# Altium PCB Pikachu_Charger.PcbDoc
Units mm, origin at the board's own origin, x right, y up, seen from the top; angles counter-clockwise.
Board outline 32.49 x 25.05 mm, 2 copper layers (Top Layer, Bottom Layer); 9 components, 7 nets, 32 pads, 2 vias.
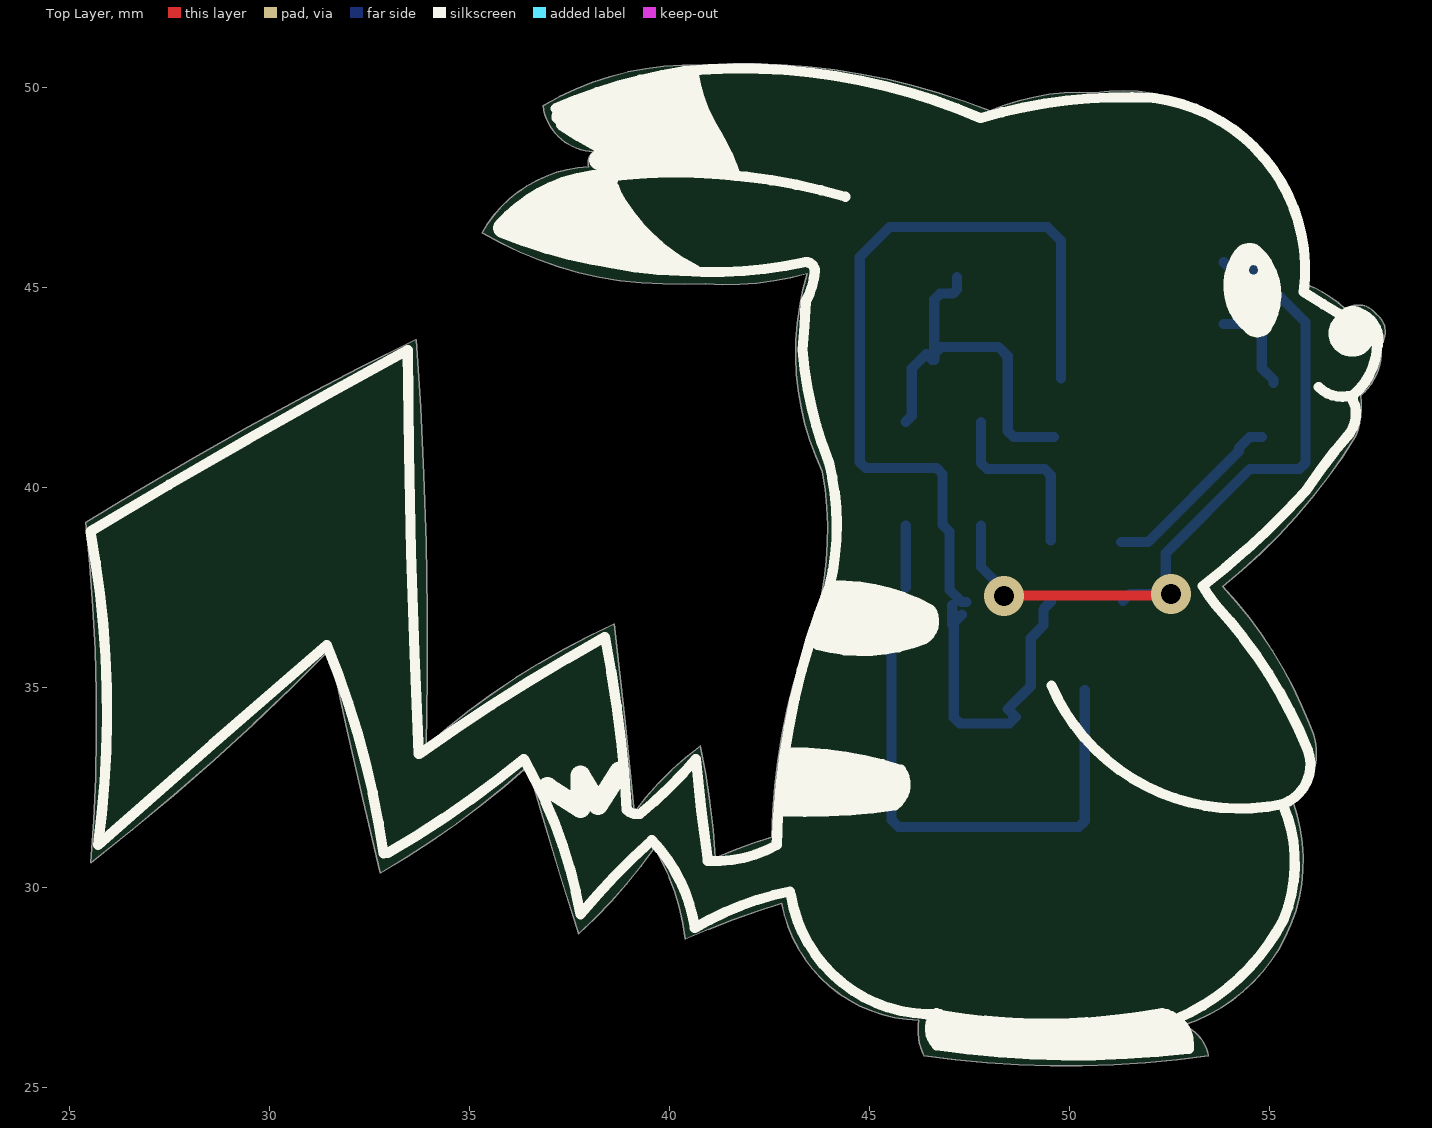
[diagram p0: Top Layer view]
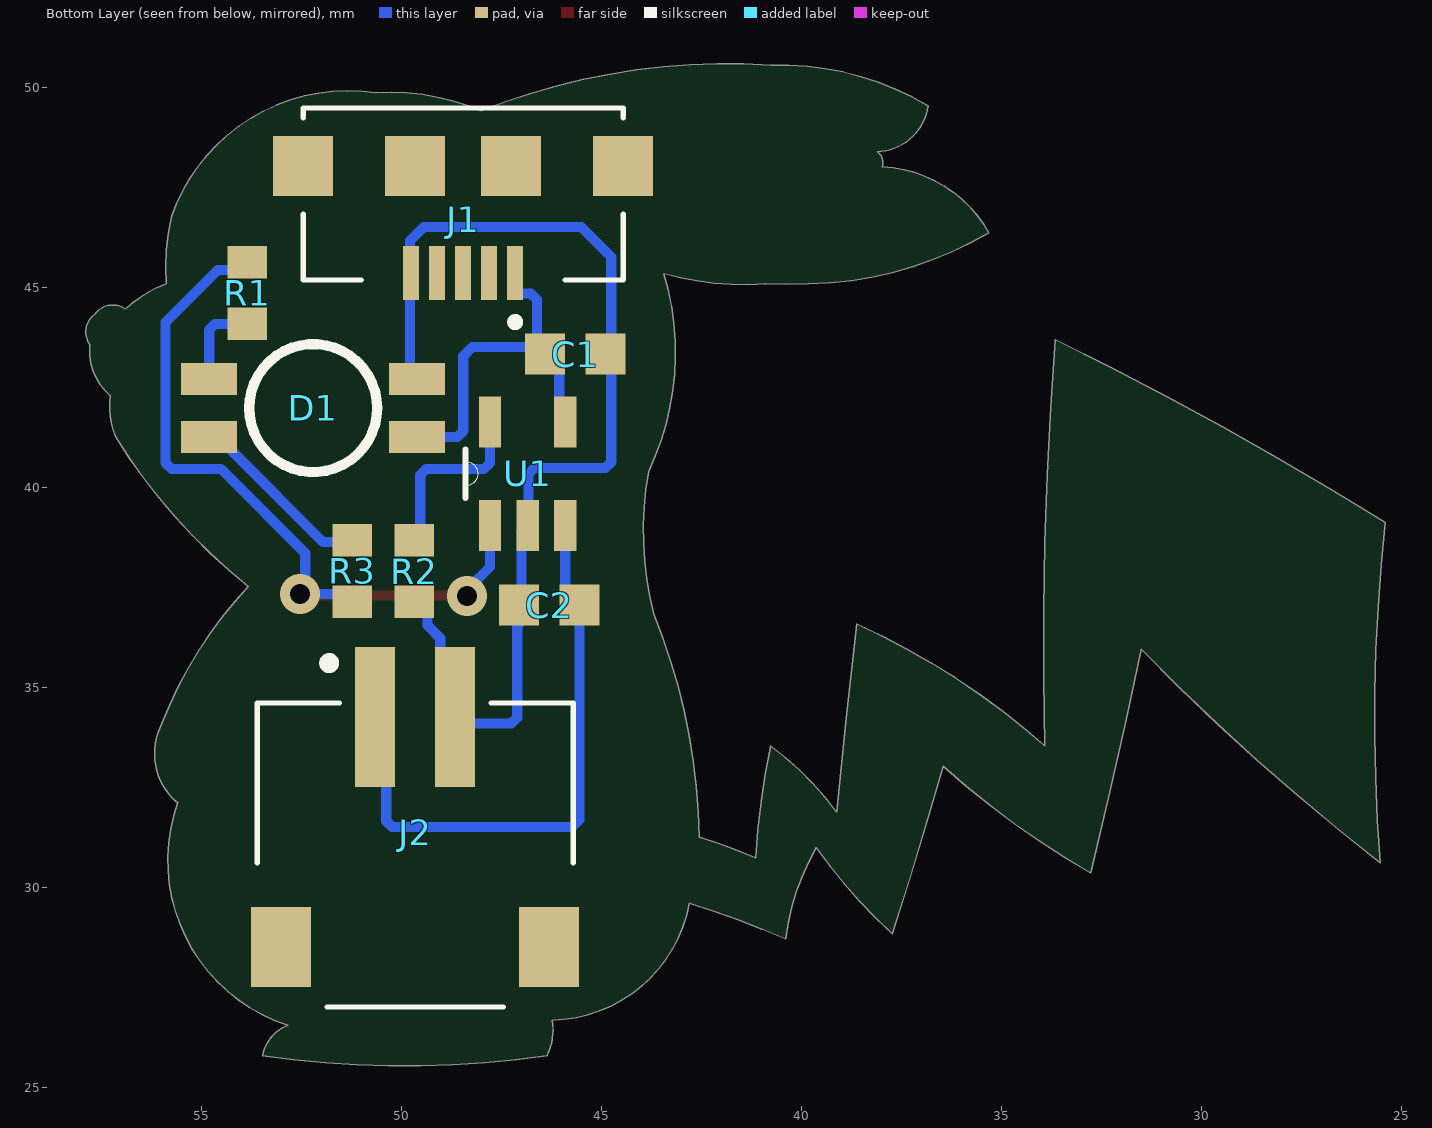
[diagram p1: Bottom Layer view, seen from below]
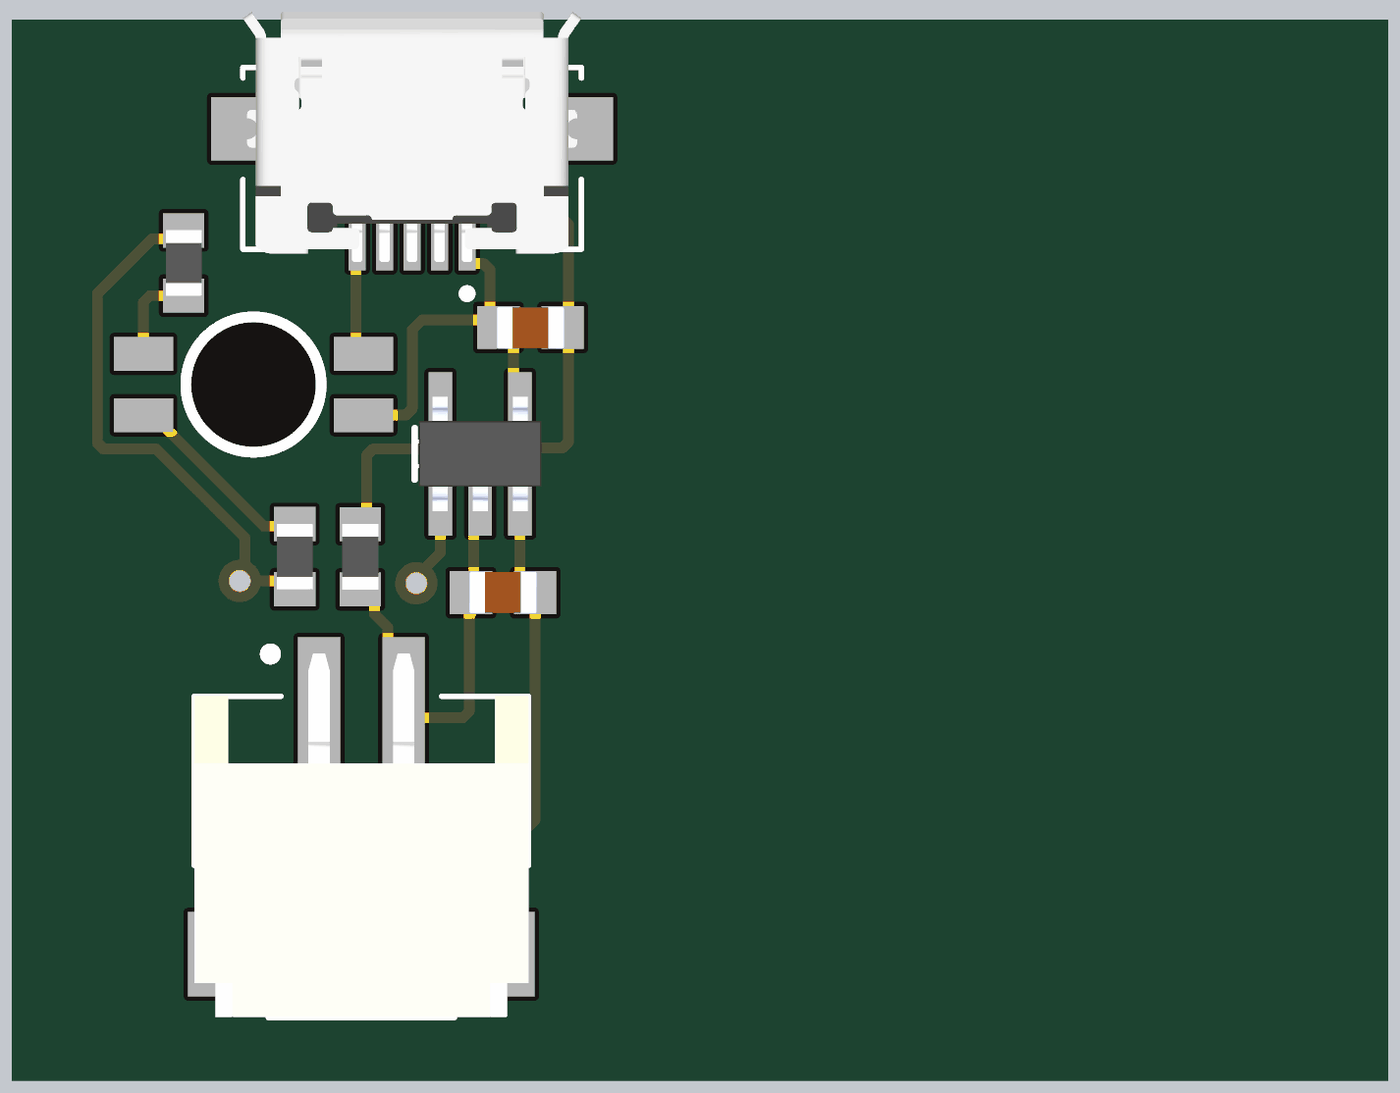
[diagram p2: 3D render of the assembled board from below, using the file's embedded part models]

## Layer stack, top to bottom
Top Solder: solder mask 0.0102, Solder Resist, Dk 3.5
Top Layer: signal copper 0.0356
Dielectric 1: dielectric 0.32, FR-4, Dk 4.8
Bottom Layer: signal copper 0.0356
Bottom Solder: solder mask 0.0102, Solder Resist, Dk 3.5

## Board outline
32.766,30.353 ccw(c21.757,49.432) 36.449,33.02 ccw(c161.566,68.646) 37.719,28.829 ccw(c28.956,38.481) 39.624,30.988 cw(c34.354,27.961) 40.386,28.702 cw(c49.149,8.635) 42.799,29.591 ccw(c46.311,30.241) 46.228,26.67 ccw(c47.625,26.416) 46.355,25.781 ccw(c49.911,50.514) 53.467,25.781 ccw(c52.483,25.606) 52.832,26.543 ccw(c51.498,30.67) 55.588,32.117 55.626,32.131 ccw(c54.547,33.337) 55.983,34.084 ccw(c46.086,30.247) 53.824,37.513 ccw(c44.647,48.979) 57.15,41.275 ccw(c55.181,42.037) 57.277,42.291 ccw(c56.306,43.416) 57.785,43.561 ccw(c57.34,43.878) 57.658,44.323 ccw(c57.213,44.006) 56.896,44.45 ccw(c54.642,41.973) 55.88,45.085 ccw(c50.038,45.466) 55.753,46.736 ccw(c51.308,45.212) 50.624,49.861 ccw(c50.274,44.15) 48.006,49.403 ccw(c41.873,34.056) 40.767,50.546 ccw(c40.515,43.388) 36.83,49.53 ccw(c38.14,49.709) 38.1,48.387 ccw(c38.291,48.112) 37.973,48.006 ccw(c38.119,44.79) 35.306,46.355 ccw(c40.087,54.543) 38.752,45.156 ccw(c40.259,58.27) 40.894,45.085 ccw(c41.465,52.197) 43.434,45.339 ccw(c50.088,43.36) 43.815,40.386 cw(c35.539,38.901) 43.688,36.83 ccw(c58.052,30.987) 42.547,31.242 42.545,31.242 ccw(c46.164,19.115) 41.148,30.734 41.136,30.733 ccw(c22.416,29.686) 40.767,33.528 ccw(c45.276,27.368) 39.116,31.877 ccw(c-367.635,-9.719) 38.608,36.576 ccw(c46.342,19.507) 33.909,33.528 ccw(c-67.818,36.068) 33.655,43.688 ccw(c74.777,-40.299) 25.4,39.116 cw(c-20.551,34.175) 25.527,30.607 ccw(c-10.395,76.813) 31.496,35.941 ccw(c174.068,65.405)

## Design rules (kind name [scope] priority, off if disabled: settings)
Clearance [All] p1: gap=0.254 ignorepadtopadclearanceinfootprint=FALSE except(0: Arc-Hole Track-Hole SMDPad-Hole THPad-Hole Via-Hole Fill-Hole Poly-Hole Region-Hole Text-Hole)
PolygonConnect [All] p1: connectstyle=Relief reliefconductorwidth=0.254 reliefentries=4 polygonreliefangle="90 Angle" airgapwidth=0.254
RoutingVias [All] p1: holewidth=0.711 width=1.27 viastyle="Through Hole" minholewidth=0.711 minwidth=1.27 maxholewidth=0.711 maxwidth=1.27
SolderMaskExpansion [All] p1: expansion=0.102 istentingtop=FALSE
Width [All] p1: maxlimit=0.254 minlimit=0.254 preferedwidth=0.254
30 further rules are at their usual default settings.

## Components (designator, comment, footprint, x,y, rotation, side; value= is the part's Value field where it differs from the comment)
C1 "GRM188R61E106KA73J" CAPC1608X100N 45.65,43.325 r0 bottom
C2 "GRM188R61E106KA73J" CAPC1608X100N 46.3,37.05 r180 bottom
D1 "XZMDKVG45WT-9" XZMDKVG45WT-9 52.2,41.975 r0 bottom
J1 "629105136821" WE_629105136821 48.45,48.025 r0 bottom
J2 "S2B-PH-SM4-TB(LF)(SN)" JST_S2B-PH-SM4-TB(LF)(SN) 49.65,34.25 r180 bottom
R1 "MCT0603HC1001FP100" RESC1508X55N 53.85,44.85 r90 bottom
R2 "MCT0603HC1001FP100" RESC1508X55N 49.675,37.9 r270 bottom
R3 "MCT0603HC1001FP100" RESC1508X55N 51.225,37.904 r270 bottom
U1 "MCP73831T-2ACI/OT" SOT95P280X145-5N 46.84,40.334 r90 bottom

## Footprints (in the part's own frame and the unit in brackets; to place one, negate y for a bottom-side part, rotate by r counter-clockwise, add the part's x,y. Pads: shape width x height; smd on the part's side, far side on the other; paste and mask are expansions set on the pad)
CAPC1608X100N [mm]
  rect 1x1.02 smd: 1(-0.759,0) 2(0.759,0)
  body extent -0.8,-0.49 0.8,0.51, height 0.4
JST_S2B-PH-SM4-TB(LF)(SN) [mm]
  rect 1x3.5 smd: 1(-1,0) 2(1,0)
  rect 1.5x2 smd: S1(-3.35,-5.75) S2(3.35,-5.75)
  silkscreen extent -3.95,-7.25 3.95,1.45, body extent -3.95,-7.24 3.95,1.36, height 5.63
RESC1508X55N [mm]
  rect 0.81x0.98 smd: 1(-0.771,0) 2(0.771,0)
  body extent -0.77,-0.43 0.77,0.43, height 0.55
SOT95P280X145-5N [mil]
  rect 50x22 smd: 1(-51,37) 2(-51,0) 3(-51,-37) 4(51,-37) 5(51,37)
  silkscreen extent -24,49 24,61, body extent -53,-57 53,57, height 57
WE_629105136821 [mm]
  rect 0.4x1.35 smd: 1(-1.3,2.675) 2(-0.65,2.675) 3(0,2.675) 4(0.65,2.675) 5(1.3,2.675)
  rect 1.5x1.5 smd: S1(-4,0) S2(-1.2,0) S3(1.2,0) S4(4,0)
  silkscreen extent -4,-1.45 4,4, body extent -4,-2.77 4,3.15, height 2.78
XZMDKVG45WT-9 [mm]
  rect 1.4x0.8 smd: 1(2.6,0.725) 2(-2.6,0.725) 3(-2.6,-0.725) 4(2.6,-0.725)
  silkscreen extent -1.6,-1.6 1.6,1.6, body extent -2.75,-1.5 2.75,1.5, height 0.2

## Part data
C1 C2: "SMD Capacitor X5R(EIA) with Capacitance: 10uF Tol. 10%. Rated Voltage: 25Vdc", Package=None, Availability=Unavailable, MP=GRM188R61E106KA73J, Price=None
J1: "USB - micro B USB 2.0 Receptacle Connector 5 Position Surface Mount, Right Angle", Package=None, Availability=Unavailable, MF="Wurth Electronics", MP=629105136821, Price=None, SnapEDA_Link=https://www.snapeda.com/parts/629105136821/Wurth%20Electronics%20Inc./view-part/1118247/?ref=snap
J2: "Connector Header Surface Mount, Right Angle 2 position 0.079 (2.00mm)", Package=None, Check_prices=https://www.snapeda.com/parts/S2B-PH-SM4-TB(LF)(SN)/JST+Sales+America+Inc./view-part/?ref=eda, Digi-Key_Part_Number=455-1749-2-ND, MF="JST Sales", MP=S2B-PH-SM4-TB(LF)(SN), Purchase-URL=https://pricing.snapeda.com/search/part/S2B-PH-SM4-TB(LF)(SN)/?ref=eda, SnapEDA_Link=https://www.snapeda.com/parts/S2B-PH-SM4-TB(LF)(SN)/JST+Sales+America+Inc./view-part/?ref=snap
R1 R2 R3: Package=None, Availability=Unavailable, MP=MCT0603HC1001FP100, Price=None
U1: "Charger IC Lithium Ion/Polymer SOT-23-5", Package="SOT-23 Microchip", Availability="In Stock", Check_prices=https://www.snapeda.com/parts/MCP73831T-2ACI/OT/Microchip/view-part/?ref=eda, MF=Microchip, MP=MCP73831T-2ACI/OT, Price=None, Purchase-URL=https://pricing.snapeda.com/search/part/MCP73831T-2ACI/OT/?ref=eda, SnapEDA_Link=https://www.snapeda.com/parts/MCP73831T-2ACI/OT/Microchip/view-part/?ref=snap

## Via types
v1: diameter 1, hole 0.5, Top Layer to Bottom Layer, tented both sides, 2 vias

## Nets (pads, with @x,y where several pads share a name; then routed paths per layer and width w, separated by ;. In a path a pad name is that pad's centre, name@x,y a point inside that pad or via, vN(x,y) a via of type N, cw(c..) or ccw(c..) an arc to the next point about the centre after c; other vN are vias at no path point)
GND: C1.1 C2.1 D1.3 J1.5 J2.2 R2.2 U1.2 | length 28
  Bottom Layer w0.254: C2.1 47.059,36.565 C2.1@47.1,36.606 ; C2.1@47.301,36.807 C2.1@47.1,36.606 ; C2.1@47.419,37.125 47.3,37.125 46.992,37.433 46.992,38.886 46.819,39.059 46.819,40.326 46.67,40.475 44.899,40.475 44.75,40.624 44.75,45.75 45.5,46.5 49.439,46.5 49.781,46.158 D1.3@49.781,42.719 ; R2.2@49.525,37.129 49.339,36.943 49.339,36.539 49.023,36.223 49.023,35.023 48.45,34.45 J2.2 48.491,34.091 47.249,34.091 47.1,34.24 C2.1@47.1,36.606
NetD1_1: D1.1 R3.1 | length 4.7
  Bottom Layer w0.254: R3.1@51.285,38.625 51.959,38.625 54.227,40.893 54.227,40.977 54.5,41.25 D1.1
NetD1_4: D1.4 R1.1 | length 2.5
  Bottom Layer w0.254: R1.1 54.651,44.079 54.8,43.93 54.8,42.973 55.09,42.683 D1.4@55.09,42.609
NetR1_2: R1.2 R3.2 U1.1 | length 19.3
  Top Layer w0.254: v1(48.35,37.275) 48.362,37.287 52.513,37.287 v1@52.525,37.3
  Bottom Layer w0.254: U1.1 47.78,38 48.35,37.429 v1(48.35,37.275) ; R3.2@51.331,37.154 51.506,37.329 v1(52.525,37.329) v1@52.4,37.329 ; v1@52.525,37.3 52.4,37.425 52.4,38.348 54.502,40.45 55.74,40.45 55.889,40.599 55.889,44.127 54.592,45.424 54.047,45.424 R1.2
NetR2_1: R2.1 U1.5 | length 4.5
  Bottom Layer w0.254: U1.5 47.78,40.599 47.928,40.45 49.376,40.45 49.525,40.301 R2.1@49.525,38.671
V_BAT: C2.2 J2.1 U1.3 | length 15.2
  Bottom Layer w0.254: C2.2 45.541,31.684 45.725,31.5 50.226,31.5 50.375,31.649 J2.1@50.375,34.925 ; C2.2@45.9,37.49 U1.3
V_USB: C1.2 D1.2 J1.1 U1.4 | length 9.7
  Bottom Layer w0.254: U1.4 46.05,41.779 46.05,42.966 C1.2 C1.2@46.559,43.175 ; C1.2@46.609,43.175 C1.2@46.609,43.327 ; J1.1@47.177,45.252 47.177,44.936 47.077,44.836 46.758,44.836 46.609,44.688 C1.2@46.609,43.327 ; D1.2 48.599,41.25 48.45,41.399 48.45,43.271 48.221,43.5 46.782,43.5 C1.2@46.609,43.327
pads on no net: J1.2 J1.3 J1.4 J1.S1 J1.S2 J1.S3 J1.S4 J2.S1 J2.S2

## Silkscreen, mask and mechanical layers (free items; w line width, h text height)
Top Overlay:
  drawing of 152 lines, arcs and shapes, not listed
Top Solder:
  rectangle: 51.725,41.325 52.725,42.525
  lines w1.25: 53.197,42.073 ccw(c52.2,42) 53.2,42
Bottom Solder:
  circle w1.25: c52.225,41.95 r1
  rectangle: 51.65,41.2 52.9,42.475
Board:
  lines w0.254: 41.136,30.733 ccw(c22.416,29.686) 40.767,33.528 ccw(c45.276,27.368) 39.116,31.877 ccw(c-367.594,-9.715) 38.608,36.576 ccw(c46.342,19.507) 33.909,33.528 ccw(c-67.818,36.068) 33.655,43.688 ccw(c74.777,-40.298) 25.4,39.116 cw(c-20.551,34.175) 25.527,30.607 ccw(c-10.395,76.813) 31.496,35.941 ccw(c174.066,65.405) 32.766,30.353 ccw(c21.757,49.432) 36.449,33.02 ccw(c161.554,68.643) 37.719,28.829 ccw(c28.956,38.481) 39.624,30.988 cw(c34.353,27.961) 40.386,28.702 cw(c49.149,8.635) 42.799,29.591 ccw(c46.311,30.241) 46.228,26.67 ccw(c47.625,26.416) 46.355,25.781 ccw(c49.911,50.514) 53.467,25.781 ccw(c52.483,25.606) 52.832,26.543 ccw(c51.498,30.67) 55.588,32.117 ; 41.148,30.734 cw(c46.164,19.113) 42.545,31.242 ; 42.547,31.242 cw(c58.052,30.987) 43.688,36.83 ccw(c35.539,38.901) 43.815,40.386 cw(c50.088,43.36) 43.434,45.339 cw(c41.465,52.197) 40.894,45.085 cw(c40.259,58.27) 38.752,45.156 cw(c40.087,54.543) 35.306,46.355 cw(c38.119,44.79) 37.973,48.006 cw(c38.291,48.112) 38.1,48.387 cw(c38.14,49.709) 36.83,49.53 cw(c40.515,43.388) 40.767,50.546 cw(c41.873,34.056) 48.006,49.403 cw(c50.274,44.15) 50.624,49.861 cw(c51.308,45.212) 55.753,46.736 cw(c50.038,45.466) 55.88,45.085 cw(c54.642,41.974) 56.896,44.45 cw(c57.213,44.005) 57.658,44.323 cw(c57.34,43.878) 57.785,43.561 cw(c56.306,43.416) 57.277,42.291 cw(c55.181,42.037) 57.15,41.275 cw(c44.647,48.979) 53.824,37.513 cw(c46.086,30.247) 55.983,34.084 cw(c54.546,33.337) 55.626,32.131

## Text inside footprints (layer, text, board x,y; h text height)
J1: Mechanical 13 "PCB EDGE" at 53.59,49.365 h0.25 r180; Mechanical 13 "CONNECTOR EDGE" at 46.845,50.635 h0.25 r180